# EAGLE board Lighting Board (EAGLE 6.5.0)
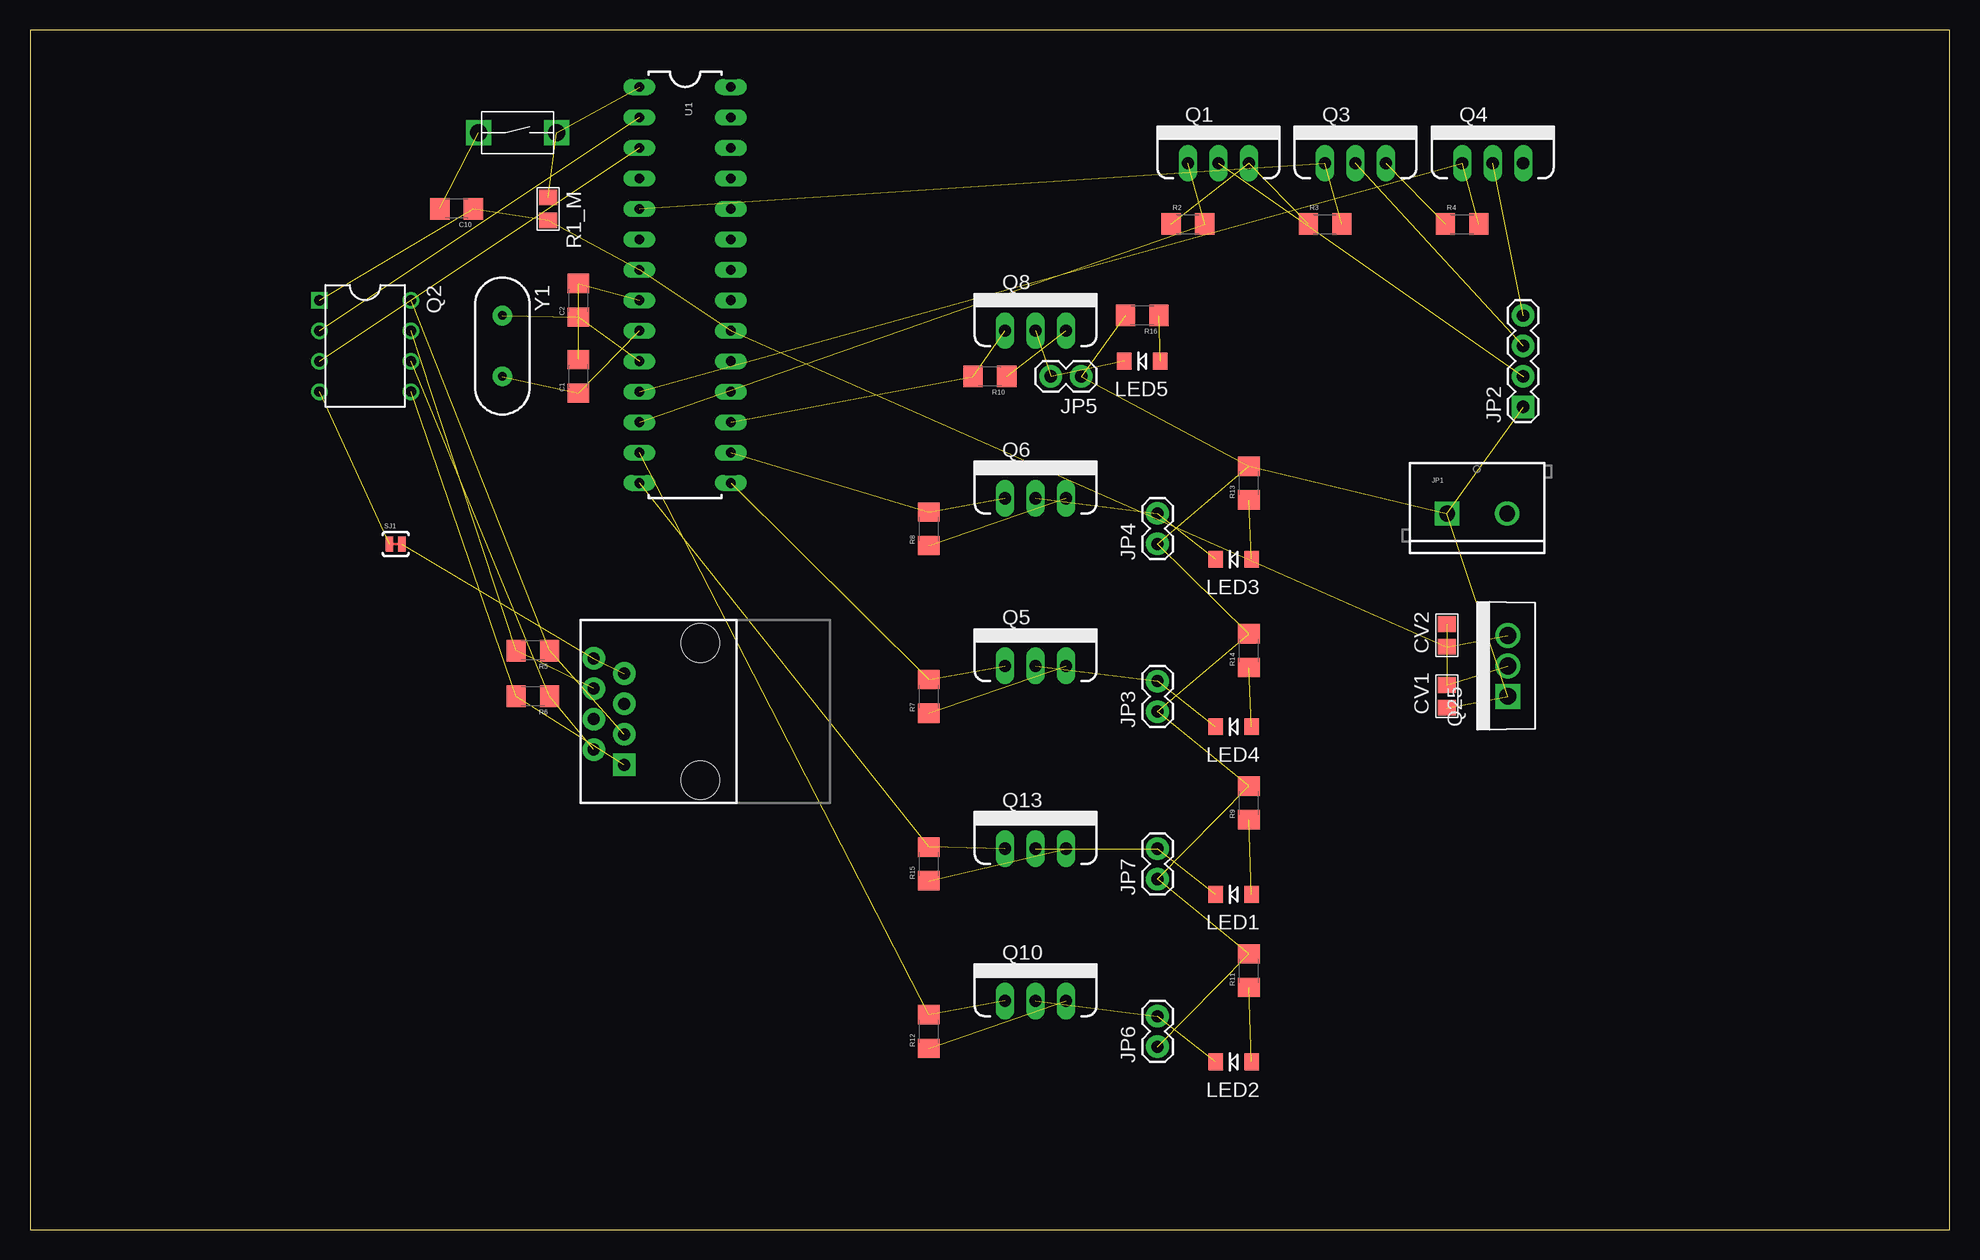
[diagram p0: board, top side]
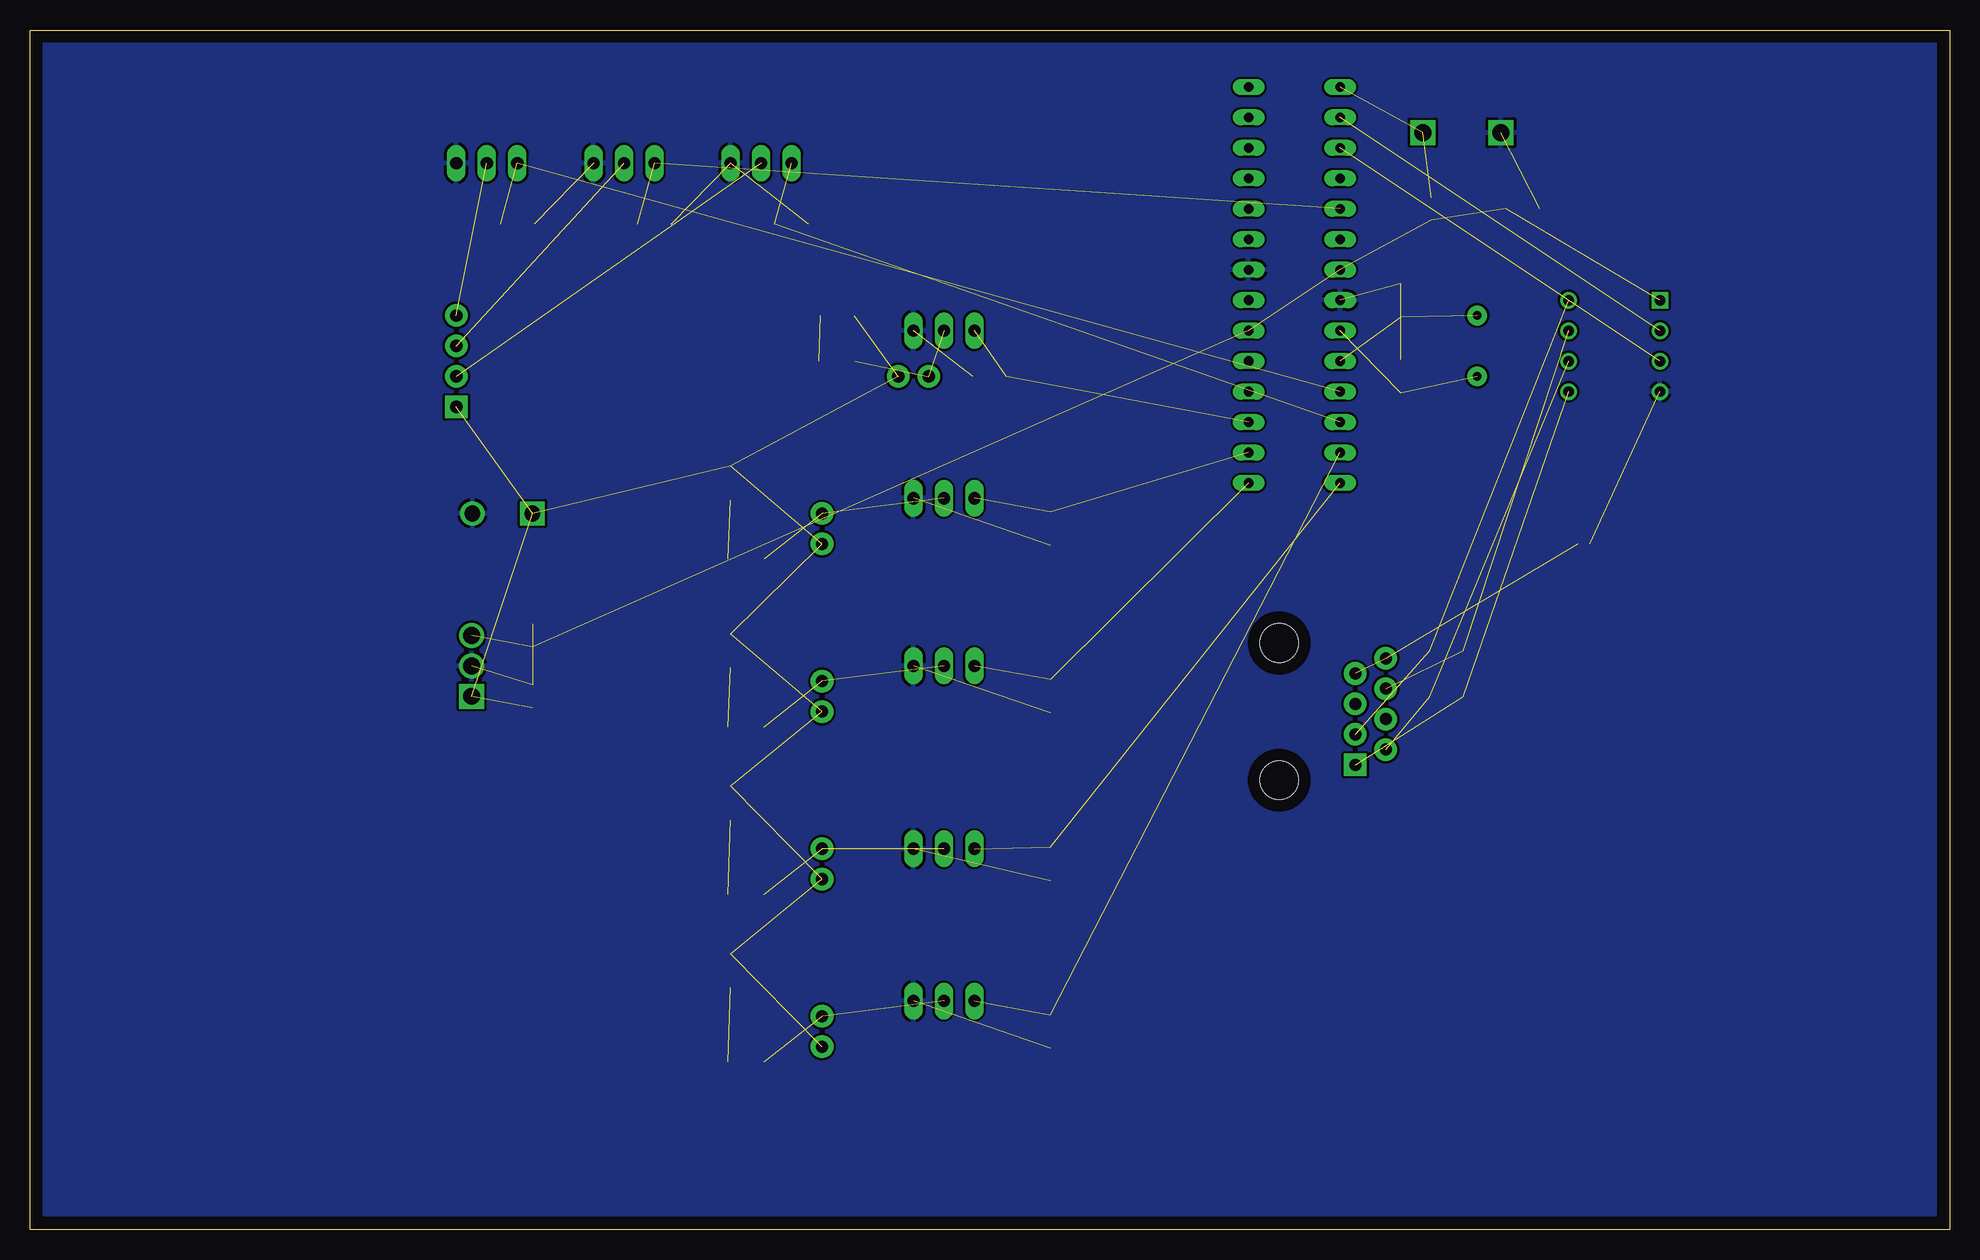
[diagram p1: board, bottom side, seen from below]

Size 160 x 100 mm. Coordinates in mm from the lower left corner, seen from the top.
Outline: 0,0 160,0 160,100 0,100 0,0
Copper layers (1*16): Top 0.035mm / dielectric 1.5mm / Bottom 0.035mm
Design rules "default": minimum track width 10mil, minimum drill 24mil, track to track 8mil, track to pad 8mil, pad to pad 8mil, via to via 8mil, smd to smd 8mil, copper to edge 40mil, drill to drill 8mil, minimum pad ring 10mil, minimum via ring 8mil, stop-mask expansion 4mil, vias tented up to drill 0mil, thermal gap 10mil

## Footprints (pad centres in the part's own frame; a part is rotated, then mirrored left to right if it is on the bottom)
1206 = smd 1.6 x 1.8: 1 -1.4,0; 2 1.4,0
C_0805 = smd 1.3 x 1.5: 1 -0.95,0; 2 0.95,0
SCREWTERMINAL-5MM-2 = drill 1.3 pad 2.032 square: 1 0,0 | drill 1.3 pad 2.032: 2 5,0
1X04 = drill 1.016 pad 1.88 square: 1 0,0 | drill 1.016 pad 1.88: 2 2.54,0; 3 5.08,0; 4 7.62,0
1X02 = drill 1.016 pad 1.88: 1 0,0; 2 2.54,0
LED-1206 = smd 1.2 x 1.4: A -1.5,0; C 1.5,0
J_TOGGLE = drill 1.4 square: P$1 -3.25,0; P$2 3.25,0
TO220V = drill 1.016 long: 1 -2.54,0; 2 0,0; 3 2.54,0
DIP8 = drill 0.864 square: 1 -3.81,-3.81 | drill 0.864: 2 -1.27,-3.81; 3 1.27,-3.81; 4 3.81,-3.81; 5 3.81,3.81; 6 1.27,3.81; 7 -1.27,3.81; 8 -3.81,3.81
TO-220 = drill 1.397 square: 1 -2.54,0 | drill 1.397: 2 0,0; 3 2.54,0
R_0805 = smd 1.3 x 1.5: 1 -0.95,0; 2 0.95,0
SJ_2S-TRACE = smd 0.635 x 1.27: 1 -0.508,0; 2 0.508,0
DIL28-3 = drill 0.813 long: 1 -16.51,-3.81; 2 -13.97,-3.81; 3 -11.43,-3.81; 4 -8.89,-3.81; 5 -6.35,-3.81; 6 -3.81,-3.81; 7 -1.27,-3.81; 8 1.27,-3.81; 9 3.81,-3.81; 10 6.35,-3.81; 11 8.89,-3.81; 12 11.43,-3.81; 13 13.97,-3.81; 14 16.51,-3.81; 15 16.51,3.81; 16 13.97,3.81; 17 11.43,3.81; 18 8.89,3.81; 19 6.35,3.81; 20 3.81,3.81; 21 1.27,3.81; 22 -1.27,3.81; 23 -3.81,3.81; 24 -6.35,3.81; 25 -8.89,3.81; 26 -11.43,3.81; 27 -13.97,3.81; 28 -16.51,3.81
RJ45-8 = drill 1 pad 1.88 square: 1 -4.445,6.35 | drill 1 pad 1.88: 2 -3.175,8.89; 3 -1.905,6.35; 4 -0.635,8.89; 5 0.635,6.35; 6 1.905,8.89; 7 3.175,6.35; 8 4.445,8.89 | hole 3.2: -5.715,0; 5.715,0
HC49US = drill 0.7 pad 1.651: 1 -2.54,0; 2 2.54,0

## Placement (x,y rotation side)
C1  0.1uF  [1206]  45.72,71.12 90 top
C2  0.1uF  [1206]  45.72,77.47 90 top
C10  .1uF  [1206]  35.56,85.09 180 top
CV1  [C_0805]  118.11,44.45 90 top
CV2  [C_0805]  118.11,49.53 90 top
JP1  M025MM  [SCREWTERMINAL-5MM-2]  118.11,59.69 0 top
JP2  [1X04]  124.46,68.58 90 top
JP3  M02PTH  [1X02]  93.98,43.18 90 top
JP4  M02PTH  [1X02]  93.98,57.15 90 top
JP5  M02PTH  [1X02]  87.63,71.12 180 top
JP6  M02PTH  [1X02]  93.98,15.24 90 top
JP7  M02PTH  [1X02]  93.98,29.21 90 top
LED1  [LED-1206]  100.33,27.94 180 top
LED2  [LED-1206]  100.33,13.97 180 top
LED3  [LED-1206]  100.33,55.88 180 top
LED4  [LED-1206]  100.33,41.91 180 top
LED5  [LED-1206]  92.71,72.39 180 top
MS  J_MC32857  [J_TOGGLE]  40.64,91.44 0 top
Q1  MOSFET-NCHANNELFQP30N06L  [TO220V]  99.06,88.9 0 top
Q2  Q_LTC490  [DIP8]  27.94,73.66 270 top
Q3  MOSFET-NCHANNELFQP30N06L  [TO220V]  110.49,88.9 0 top
Q4  MOSFET-NCHANNELFQP30N06L  [TO220V]  121.92,88.9 0 top
Q5  MOSFET-NCHANNELFQP30N06L  [TO220V]  83.82,46.99 0 top
Q6  MOSFET-NCHANNELFQP30N06L  [TO220V]  83.82,60.96 0 top
Q8  MOSFET-NCHANNELFQP30N06L  [TO220V]  83.82,74.93 0 top
Q10  MOSFET-NCHANNELFQP30N06L  [TO220V]  83.82,19.05 0 top
Q13  MOSFET-NCHANNELFQP30N06L  [TO220V]  83.82,31.75 0 top
Q25  LDO  [TO-220]  123.19,46.99 90 top
R1_M  200  [R_0805]  43.18,85.09 270 top
R2  1k  [1206]  96.52,83.82 0 top
R3  1k  [1206]  107.95,83.82 0 top
R4  1k  [1206]  119.38,83.82 0 top
R5  120 Ohm  [1206]  41.91,48.26 180 top
R6  120 Ohm  [1206]  41.91,44.45 180 top
R7  1k  [1206]  74.93,44.45 90 top
R8  1k  [1206]  74.93,58.42 90 top
R9  [1206]  101.6,35.56 90 top
R10  1k  [1206]  80.01,71.12 180 top
R11  [1206]  101.6,21.59 90 top
R12  1k  [1206]  74.93,16.51 90 top
R13  200  [1206]  101.6,62.23 90 top
R14  200  [1206]  101.6,48.26 90 top
R15  1k  [1206]  74.93,30.48 90 top
R16  200  [1206]  92.71,76.2 180 top
SJ1  SOLDERJUMPERTRACE  [SJ_2S-TRACE]  30.48,57.15 0 top
U1  ATMEGA328P_PDIP  [DIL28-3]  54.61,78.74 270 top
U$1  RJ45-8PTH  [RJ45-8]  55.88,43.18 90 top
Y1  [HC49US]  39.37,73.66 270 top

## Library data of the parts
C1 C2 R2-R16 SJ1 = SparkFun-Passives
C10 = SparkFun-Retired; PROD_ID: CAP-10009
CV1 CV2 R1_M = Lib_Passive
JP1-JP7 U$1 = SparkFun-Connectors
LED1-LED5 = LilyPad-Wearables
MS Q2 Q25 = PCB0M1
Q1 Q3-Q6 Q8 Q10 Q13 = SparkFun-DiscreteSemi; PROD_ID: TRANS-10060
U1 = SparkFun-DigitalIC
Y1 = SparkFun-FreqCtrl

## Nets
D1: Q10.1 R12.2 U1.13
D2: Q13.1 R15.2 U1.14
GND: C1.2 C2.2 C10.2 CV1.2 CV2.2 JP1.2 MS.P$1 Q1.3 Q2.4 Q3.3 Q4.3 Q5.3 Q6.3 Q8.3 Q10.3 Q13.3 Q25.2 R2.1 R3.1 R4.1 R7.1 R8.1 R10.1 R12.1 R15.1 SJ1.1 U1.8 U1.22
N$1: Q2.5 R6.2 U$1.1
N$2: C2.1 U1.10 Y1.1
N$4: LED1.A R9.1
N$5: LED2.A R11.1
N$6: LED3.A R13.1
N$7: LED4.A R14.1
N$8: LED5.A R16.1
N$9: Q2.6 R6.1 U$1.2
N$10: Q2.7 R5.2 U$1.6
N$11: Q2.8 R5.1 U$1.3
N$12: SJ1.2 U$1.7 U$1.8
N$13: C1.1 U1.9 Y1.2
N$15: JP2.2 Q1.2
N$16: JP2.3 Q3.2
N$17: JP2.4 Q4.2
N$88: MS.P$2 R1_M.1 U1.1
N%2: JP4.2 LED3.C Q6.2
N%3: JP3.2 LED4.C Q5.2
N%106: JP5.2 LED5.C Q8.2
N%107: JP6.2 LED2.C Q10.2
N%110: JP7.2 LED1.C Q13.2
PWM1: Q3.1 R3.2 U1.5
PWM2: Q4.1 R4.2 U1.11
PWM3: Q1.1 R2.2 U1.12
PWM4: Q5.1 R7.2 U1.15
PWM5: Q6.1 R8.2 U1.16
PWM6: Q8.1 R10.2 U1.17
RXD: Q2.2 U1.2
TXD: Q2.3 U1.3
V5: C10.1 CV2.1 Q2.1 Q25.3 R1_M.2 U1.7 U1.20
VIN: CV1.1 JP1.1 JP2.1 JP3.1 JP4.1 JP5.1 JP6.1 JP7.1 Q25.1 R9.2 R11.2 R13.2 R14.2 R16.2

## Tracks (layer width: path | path; a pad name or v marks a point on that pad's centre or on a via)
D1  (2 unrouted)
D2  (2 unrouted)
GND  (14 unrouted)
  pour Bottom: 1.27,99.06 1.27,1.27 158.75,1.27 158.75,99.06
N$1  (2 unrouted)
N$2  (2 unrouted)
N$4  (1 unrouted)
N$5  (1 unrouted)
N$6  (1 unrouted)
N$7  (1 unrouted)
N$8  (1 unrouted)
N$9  (2 unrouted)
N$10  (2 unrouted)
N$11  (2 unrouted)
N$12  (2 unrouted)
N$13  (2 unrouted)
N$15  (1 unrouted)
N$16  (1 unrouted)
N$17  (1 unrouted)
N$88  (2 unrouted)
N%2  (2 unrouted)
N%3  (2 unrouted)
N%106  (2 unrouted)
N%107  (2 unrouted)
N%110  (2 unrouted)
PWM1  (2 unrouted)
PWM2  (2 unrouted)
PWM3  (2 unrouted)
PWM4  (2 unrouted)
PWM5  (2 unrouted)
PWM6  (2 unrouted)
RXD  (1 unrouted)
TXD  (1 unrouted)
V5  (6 unrouted)
VIN  (13 unrouted)